# Altium PCB TRAY5.PcbDoc
Units mil, origin at the board's own origin, x right, y up, seen from the top; angles counter-clockwise.
Board outline 7360 x 1300 mil, 2 copper layers (Top Layer, Bottom Layer); 49 components, 35 nets, 178 pads, 42 vias.
Unrouted connection lines stored in the file: 64.
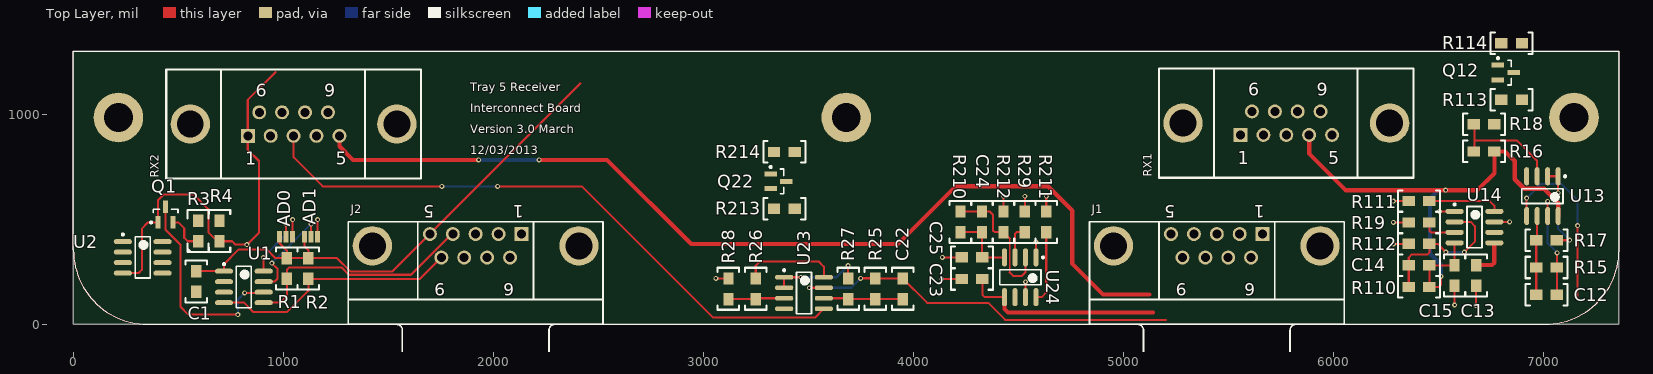
[diagram p0: Top Layer view]
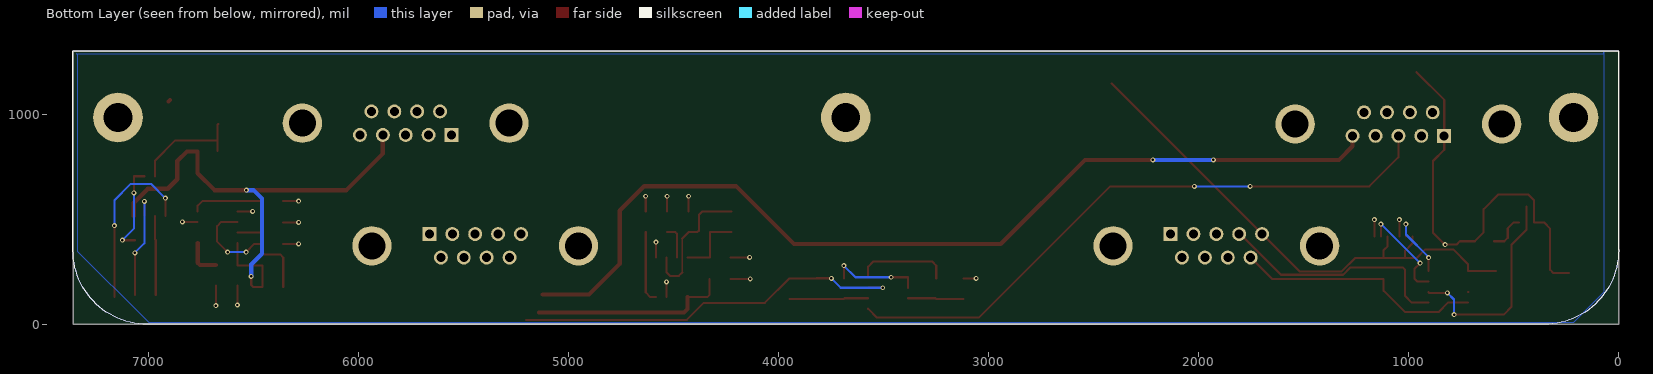
[diagram p1: Bottom Layer view, seen from below]

## Layer stack, top to bottom
Top Layer: signal copper 1.4
Dielectric: dielectric 12.6, FR-4, Dk 4.8
Bottom Layer: signal copper 1.4

## Board outline
0,0 0,1300 7360,1300 7360,0 0,0

## Design rules (kind name [scope] priority, off if disabled: settings)
Clearance [All] p1: gap=6
HoleSize [All] p1: absolutevalues=TRUE maxlimit=196.85 minlimit=11.81 maxpercent=80.000 minpercent=20.000
MinimumSolderMaskSliver [All] p1: minsoldermaskwidth=4
PolygonConnect [All] p1: connectstyle=Relief reliefconductorwidth=10 reliefentries=4 polygonreliefangle="90 Angle" airgapwidth=10
RoomDefinition SHIFTER2 [InComponentClass('SHIFTER2')] p1: confinementstyle=ConfineIn formatcopy=TRUE lockcomponents=FALSE outline 3497.87,481 3497.87,891 3037,891 3037,481
RoomDefinition LDO2 [InComponentClass('LDO2')] p2: confinementstyle=ConfineIn formatcopy=TRUE lockcomponents=FALSE outline 4050,840 4050,30 4720,30 4720,840
RoomDefinition LDO1 [InComponentClass('LDO1')] p3: confinementstyle=ConfineIn formatcopy=TRUE lockcomponents=FALSE outline 6057.51,3 6867.51,3 6867.51,673 6057.51,673
RoomDefinition AMP2 [InComponentClass('AMP2')] p4: confinementstyle=ConfineIn formatcopy=TRUE lockcomponents=FALSE outline 3040,29.21 4020,29.21 4020,479.21 3040,479.21
RoomDefinition AMP1 [InComponentClass('AMP1')] p5: confinementstyle=ConfineIn formatcopy=TRUE lockcomponents=FALSE outline 6576,1191 6576,70.51 7327,70.51 7327,1191
RoutingVias [All] p1: holewidth=15.75 width=23.62 viastyle="Through Hole" minholewidth=15.75 minwidth=23.62 maxholewidth=39.37 maxwidth=78.74
SilkscreenOverComponentPads [IsPad] p1: minsilkscreentomaskgap=10
SolderMaskExpansion [All] p1: expansion=3.94
Width [All] p1: maxlimit=50 minlimit=8 preferedwidth=20
25 further rules are at their usual default settings.

## Classes and differential pairs
channel class SHIFTER: SHIFTER1 SHIFTER2
channel class LDO: LDO1 LDO2
channel class AMP: AMP1 AMP2
component class SHIFTER2: Q22 R213 R214
component class SHIFTER1: Q12 R113 R114
component class LDO2: C23 C24 C25 R29 R210 R211 R212 U24
component class LDO1: C13 C14 C15 R19 R110 R111 R112 U14
component class AMP2: C22 R25 R26 R27 R28 U23
component class AMP1: C12 R15 R16 R17 R18 U13
component class Designator: AD0 AD1 C1 P1 Q1 R1 R2 R3 R4 U1
component class Tray5: J1 J2 RX1 RX2

## Components (designator, comment, footprint, x,y, rotation, side; value= is the part's Value field where it differs from the comment)
AD0 "Jumper Select" SOLDER_JUMPER_3_A 1020.87,410.13 r180 top
AD1 "Jumper Select" SOLDER_JUMPER_3_A 1139.87,410.13 r180 top
C1 "0805 Cap" "0805 Cap" 585,204 r270 top
C12 "0805 Cap" "0805 Cap" 7017,140.51 r180 top (schematic designator C2)
C13 "0805 Cap" "0805 Cap" 6681.51,233 r270 top (schematic designator C3)
C14 "0805 Cap" "0805 Cap" 6409.51,281 r180 top (schematic designator C4)
C15 "0805 Cap" "0805 Cap" 6578.51,233 r270 top (schematic designator C5)
C22 "0805 Cap" "0805 Cap" 3950,169.21 r270 top (schematic designator C2)
C23 "0805 Cap" "0805 Cap" 4280,216 r180 top (schematic designator C3)
C24 "0805 Cap" "0805 Cap" 4328,488 r90 top (schematic designator C4)
C25 "0805 Cap" "0805 Cap" 4280,319 r180 top (schematic designator C5)
J1 "D Connector 9" DSUB1.385-2H9 5446.06,0 r180 top
J2 "D Connector 9" DSUB1.385-2H9 1916.14,0 r180 top
P1 "Header 2" HDR1X2 6350.63,4340.39 r270 top
Q1 "DMP2004K" DMP2004KDITR-ND 439,521 r90 top
Q12 "BSS138" SOT23 6820.63,1199 r0 top (schematic designator Q2)
Q22 "BSS138" SOT23 3356.21,681 r0 top (schematic designator Q2)
R1 "0805 Resistor" "0805 Resistor" 1017,266 r270 top
R2 "0805 Resistor" "0805 Resistor" 1119,266 r270 top
R3 "PTC Fuse" "0805 Resistor" 594,445 r270 top
R4 "0603 Resistor" "0805 Resistor" 696,445 r270 top
R15 "0805 Resistor" "0805 Resistor" 7017,270.51 r180 top (schematic designator R5)
R16 "0805 Resistor" "0805 Resistor" 6719,823.51 r0 top (schematic designator R6)
R17 "0805 Resistor" "0805 Resistor" 7017,400.51 r0 top (schematic designator R7)
R18 "0805 Resistor" "0805 Resistor" 6719,953.51 r0 top (schematic designator R8)
R19 "0805 Resistor" "0805 Resistor" 6409.51,485 r0 top (schematic designator R9)
R25 "0805 Resistor" "0805 Resistor" 3820,169.21 r270 top (schematic designator R5)
R26 "0805 Resistor" "0805 Resistor" 3250,169.21 r90 top (schematic designator R6)
R27 "0805 Resistor" "0805 Resistor" 3690,169.21 r90 top (schematic designator R7)
R28 "0805 Resistor" "0805 Resistor" 3120,169.21 r90 top (schematic designator R8)
R29 "0805 Resistor" "0805 Resistor" 4532,488 r270 top (schematic designator R9)
R110 "0805 Resistor" "0805 Resistor" 6409.51,178 r180 top (schematic designator R10)
R111 "0805 Resistor" "0805 Resistor" 6409.51,587 r180 top (schematic designator R11)
R112 "0805 Resistor" "0805 Resistor" 6409.51,383 r180 top (schematic designator R12)
R113 "0805 Resistor" "0805 Resistor" 6850.63,1069 r180 top (schematic designator R13)
R114 "0805 Resistor" "0805 Resistor" 6850.63,1339 r180 top (schematic designator R14)
R210 "0805 Resistor" "0805 Resistor" 4225,488 r90 top (schematic designator R10)
R211 "0805 Resistor" "0805 Resistor" 4634,488 r90 top (schematic designator R11)
R212 "0805 Resistor" "0805 Resistor" 4430,488 r90 top (schematic designator R12)
R213 "0805 Resistor" "0805 Resistor" 3386.21,551 r180 top (schematic designator R13)
R214 "0805 Resistor" "0805 Resistor" 3386.21,821 r180 top (schematic designator R14)
RX1 "D Connector 9" "DSUB Upright" 5777,957.98 r180 top
RX2 "D Connector 9" "DSUB Upright" 1048.86,953.85 r180 top
U1 "DS24820Z+_ND" DS2482-100 812,178 r0 top
U2 "TO-92" DS18S20 330,319 r0 top
U13 "LM2904" "SOIC8 - LT1120A" 6997,610.51 r270 top (schematic designator U3)
U14 "LT1120A" "SOIC8 - LT1120A" 6673.51,463 r0 top (schematic designator U4)
U23 "LM2904" "SOIC8 - LT1120A" 3480,149.21 r0 top (schematic designator U3)
U24 "LT1120A" "SOIC8 - LT1120A" 4510,224 r270 top (schematic designator U4)

## Footprints (in the part's own frame and the unit in brackets; to place one, negate y for a bottom-side part, rotate by r counter-clockwise, add the part's x,y. Pads: shape width x height; smd on the part's side, far side on the other; paste and mask are expansions set on the pad)
"0805 Cap" [mm] "0805 Capacitor"
  rect 1.5x1.25 smd: 1(1.25,0) 2(-1.25,0)
  silkscreen extent -2.54,-1.3 2.54,1.3, body extent -1,-0.63 1.1,0.63, height 0.9
"0805 Resistor" [mm] "0805 Resistor"
  rect 1.5x1.25 smd: 1(1.25,0) 2(-1.25,0)
  silkscreen extent -2.54,-1.3 2.54,1.3, body extent -1,-0.63 1.1,0.63, height 0.6
DMP2004KDITR-ND [mm] "SOT23, 3-Leads, Body 3.0x2.5mm (max), Pitch 0.89mm, IPC Medium Density"
  rect 1.5x0.6 smd: 1(-0.9,0.89) 2(-0.9,-0.89) 3(1,0)
  silkscreen extent -1.02,-1.5 0.7,1.86, body extent -0.7,-1.5 0.7,1.5, height 1.2
DS18S20 [mm] "SOIC, 8-Leads, Body 5.0x4.0mm (max), Pitch 1.27mm, IPC Medium Density"
  oval 2.2x0.6 smd: 1(-2.4,1.905) 2(-2.4,0.635) 3(-2.4,-0.635) 4(-2.4,-1.905) 5(2.4,-1.905) 6(2.4,-0.635) 7(2.4,0.635) 8(2.4,1.905)
  silkscreen extent -2.52,-2.5 0.9,2.88, body extent -2,-2.5 2,2.5, height 1.75
DS2482-100 [mm] "SOIC, 8-Leads, Body 5.0x4.0mm (max), Pitch 1.27mm, IPC Medium Density"
  oval 2.2x0.6 smd: 1(-2.4,1.905) 2(-2.4,0.635) 3(-2.4,-0.635) 4(-2.4,-1.905) 5(2.4,-1.905) 6(2.4,-0.635) 7(2.4,0.635) 8(2.4,1.905)
  silkscreen extent -2.52,-2.5 0.9,2.88, body extent -2,-2.5 2,2.5, height 1.75
DSUB1.385-2H9 [mm] "Connector; D Subminiature; 9 Position; Right Angle; Pitch 1.385 mm"
  rect 1.69x1.69 hole 1.09: 1(-5.54,-10.92)
  round 1.69 hole 1.09: 2(-2.77,-10.92) 3(0,-10.92) 4(2.77,-10.92) 5(5.54,-10.92) 6(-4.155,-8.08) 7(-1.385,-8.08) 8(1.385,-8.08) 9(4.155,-8.08)
  round 4.76 hole 3.26: 10(-12.495,-9.5) 11(12.495,-9.5)
  silkscreen extent -15.4,-12.4 15.4,6
"DSUB Upright" [mm] "171-009-213R911"
  rect 1.69x1.69 hole 1.09: 1(5.54,1.42)
  round 1.69 hole 1.09: 2(2.77,1.42) 3(0,1.42) 4(-2.77,1.42) 5(-5.54,1.42) 6(4.153,-1.42) 7(1.384,-1.42) 8(-1.384,-1.42) 9(-4.153,-1.42)
  round 4.76 hole 3.26: 10(12.5,0) 11(-12.5,0)
  silkscreen extent -15.4,-6.6 15.4,6.6
HDR1X2 [mm] "Connector; Header; 2 Position"
  rect 1.5x1.5 hole 0.9: 1(0,0)
  round 1.5 hole 0.9: 2(2.54,0)
  silkscreen extent -1.27,-1.27 3.81,1.27
"SOIC8 - LT1120A" [mm] "SOIC, 8-Leads, Body 5.0x4.0mm (max), Pitch 1.27mm, IPC Medium Density"
  oval 2.2x0.6 smd: 1(-2.4,1.905) 2(-2.4,0.635) 3(-2.4,-0.635) 4(-2.4,-1.905) 5(2.4,-1.905) 6(2.4,-0.635) 7(2.4,0.635) 8(2.4,1.905)
  silkscreen extent -2.52,-2.5 0.9,2.88, body extent -1.99,-2.5 1.99,2.5, height 1.75
SOLDER_JUMPER_3_A [mm]
  rect 0.6x1.4 smd: 1(1,-0.2) 2(0.2,-0.2) 3(-0.6,-0.2)
SOT23 [mm] "SOT23, 3-Leads, Body 3.0x2.5mm (max), Pitch 0.89mm, IPC Medium Density"
  rect 1.5x0.6 smd: 1(-0.9,0.89) 2(-0.9,-0.89) 3(1,0)
  silkscreen extent -1.02,-1.5 0.7,1.86, body extent -0.7,-1.5 0.7,1.5, height 1.2

## Part data
AD0 AD1: library part "Header 3", "Header, 3-Pin"
C1: library part "0805 MLCC - X7R, 10%", "0805 MLCC - X7R, 10%"
C12 C13 C14 C15 C22 C23 C24 C25: library part "0805 MLCC - NP0, 5%", "0805 MLCC - NP0, 5%"
J1 J2: "Receptacle Assembly, 9 Position, Right Angle"
P1: "Header, 2-Pin"
Q1: "MOSFET P-CH 20V 600MA SOT23-3"
Q12 Q22: "N-Channel MOSFET"
R1 R2 R15 R16 R17 R18 R19 R25 R26 R27 R28 R29 R110 R111 R112 R113 R114 R210 R211 R212 R213 R214: library part "0805 Thick Film Resistor 1%", "0805 Thick Film Resistor 1%"
R3: library part "0805 PTC Fuse", "0805 PTC Fuse"
R4: library part "0603 Thick Film Resistor 1%", "0603 Thick Film Resistor 1%"
RX1 RX2: "Receptacle Assembly, 9 Position, Upright"
U1: "I2C to 1-Wire Master"
U2: library part DS18S20, "1-Wire Digital Thermometer"
U13 U23: "Dual Operational Amplifier"
U14 U24: "Low Dropout Regulator"

## Free pads (board coordinates)
  round 236.22 hole 137.8: 0(214.57,985.04) 0(3681.1,985.04) 0(7147.64,985.04)

## Via types
v1: diameter 23.62, hole 11.81, Top Layer to Bottom Layer, 42 vias

## Nets (pads, with @x,y where several pads share a name; then routed paths per layer and width w, separated by ;. In a path a pad name is that pad's centre, name@x,y a point inside that pad or via, vN(x,y) a via of type N, cw(c..) or ccw(c..) an arc to the next point about the centre after c; other vN are vias at no path point)
3V3_TELEM_RX: AD0.1 AD1.1 C1.2 J2.5 Q12.1 Q22.1 R1.2 R2.2 R3.2 R4.2 R114.1 R214.1 U1.1 | length 2535
  Top Layer w10: C1.2 717.3,253.21 U1.1 717.51,286.51 787.94,356.94 921.06,356.94 962.79,315.21 R1.2 ; AD0.1 981.5,386.5 1017,351 R1.2 ; AD1.1 1100.5,372.5 1119,354 R2.2 ; 2415.11,1147 J2.5 1520.11,252 1319,252 1255.79,315.21 R2.2 ; R1.2 R2.2
8V0_RX1: C14.2 C15.2 R16.1 R110.2 R113.2 RX1.4 U13.8 U14.4 | length 2620.1
  Top Layer w10: v1(6513,228) 6513,187 6504,178 R110.2 C14.2 6577.3,281 C15.2 6579.02,282.72 U14.4
  Top Layer w20: RX1.4 5886.06,812.94 6060,639 v1(6536,639) 6687.43,639 6768.21,719.79 R16.1 6818.69,823.51 6865,777.2 6865,691.17 6910.48,645.69 7005.31,645.69 7072,579 U13.8 ; R113.2 R113.2@6907,1061.84
  Bottom Layer w20: v1(6513,228) 6513,285 6462,336 6462,599 6502,639 v1(6536,639)
8V0_RX2: C24.2 C25.2 R26.1 R210.2 R213.2 RX2.4 U23.8 U24.4 | length 783.5
  Top Layer w10: R26.1 3250,279.21 3270,299.21 3550,299.21 3574.49,274.72 U23.8 ; R210.2 C24.2 4328,320.21 C25.2 4329.72,318.49 U24.4
9V1_RX1: C13.2 J1.2 U14.5 | length 185.7
  Top Layer w20: C13.2 6756.72,282.21 6768,293.49 U14.5
9V1_RX2: C23.2 J1.7 U24.5 | length 956.2
  Top Layer w10: C23.2 4329.21,140.79 4340.49,129.51 U24.5
  Top Layer w20: U24.5 4435,73 4452,56 5142,56
13V6_RX1: J1.1 RX1.5
13V6_RX2: J1.6 RX2.5 | length 4576.2
  Top Layer w20: RX2.5 1266.97,848.03 1332,783 v1(1930,783) ; v1(2218,783) 2542,783 2943,382 3928,382 4204,658 4641,658 4758,541 4758,288 4904,142 5124,142
  Bottom Layer w20: v1(1930,783) v1(2218,783)
AF_RX1_IN: RX1.3 U13.5 | length 847.9
  Top Layer w10: U13.5 v1(6922,601) ; 7165,131 v1(7165,470)
  Bottom Layer w10: v1(6922,601) 6990,669 7086,669 7165,590 v1(7165,470)
AF_RX1_OUT: C12.2 J1.9 R15.2 U13.7 | length 533.5
  Top Layer w10: U13.7 v1(7022,585.51) ; C12.2 R15.2 7067,271.3 v1(7067,340.51)
  Bottom Layer w10: v1(7022,585.51) 7022,385.51 v1(7067,340.51)
AF_RX2_IN: RX2.3 U23.5 | length 2962
  Top Layer w10: RX2.3 1048.86,795.14 1187,657 v1(1755,657) ; v1(2021,657) 2422,657 3047,32 3532.28,32 U23.5
  Bottom Layer w10: v1(1755,657) v1(2021,657)
AF_RX2_OUT: C22.2 J1.8 R25.2 U23.7 | length 1870.2
  Top Layer w10: v1(3505,174.21) U23.7 ; v1(3750,219.21) 3819.21,219.21 R25.2 C22.2 4066.43,102 4357,102 4438,21 5205,21
  Bottom Layer w10: v1(3505,174.21) 3705,174.21 v1(3750,219.21)
COS_RX1_IN: Q12.2 R113.1 RX1.8
COS_RX1_OUT: J1.5 Q12.3 R114.2
COS_RX2_IN: Q22.2 R213.1 RX2.8
COS_RX2_OUT: J1.4 Q22.3 R214.2
GND: AD0.3 AD1.3 C1.1 C13.1 C15.1 C23.1 C25.1 J1.3 J1.10 J1.11 J2.8 J2.10 J2.11 P1.1 R18.1 R19.2 R28.1 R29.2 R111.1 R112.1 R211.1 R212.1 RX1.9 RX1.10 RX1.11 RX2.9 RX2.10 RX2.11 U1.3 U2.3 U2.5 U13.4 U14.1 U14.7 U23.4 U24.1 U24.7 | length 1325
  Top Layer w10: U1.3@715.72,154.79 U1.3 ; AD0.3 v1(1044.5,498.75) ; AD1.3 v1(1163.5,498.75) ; v1(3060,218.43) R28.1 ; v1(4136,216) C23.1 ; v1(4139,319) C25.1 ; R212.1 v1(4430,610) ; R29.2 v1(4532,610) ; U24.7 v1(4535,202.3) ; U24.1 v1(4585,391.28) ; R211.1 v1(4634,610) ; v1(6287.51,383) R112.1 ; v1(6287.51,485) R19.2 ; v1(6287.51,587) R111.1 ; v1(6506.24,538) U14.1 ; v1(6578.51,92) C15.1 ; v1(6681.51,89) C13.1 ; U14.7 v1(6840.79,488)
NetAD0_2: AD0.2 U1.8 | length 328.4
  Top Layer w10: v1(905,318) 905,254.49 U1.8 ; AD0.2 v1(1013,477)
  Bottom Layer w10: v1(905,318) 905,320 1013,428 v1(1013,477)
NetAD1_2: AD1.2 U1.7 | length 479.5
  Top Layer w10: U1.7 958,203 972,217 972,264 v1(945,291) ; AD1.2 v1(1132,477)
  Bottom Layer w10: v1(945,291) 1131,477 v1(1132,477)
NetC12_1: C12.1 R15.1 R17.2 U13.6 | length 377.3
  Top Layer w10: C12.1 R15.1 R17.2 6972,404.72 U13.6
NetC14_1: C14.1 R110.1 R112.2 U14.2 | length 722.3
  Top Layer w10: R110.1 C14.1 6360.3,317.79 6375.51,333 6450.51,333 6458.72,341.21 R112.2 6498.3,383 v1(6537.51,343.79) ; U14.2 6655.3,488 6675.51,467.79 6675.51,393.79 v1(6625.51,343.79)
  Bottom Layer w10: v1(6537.51,343.79) v1(6625.51,343.79)
NetC22_1: C22.1 R25.1 R27.2 U23.6 | length 377.3
  Top Layer w10: U23.6 3685.79,124.21 R27.2 R25.1 C22.1
NetC24_1: C24.1 R210.1 R212.2 U24.2 | length 653.1
  Top Layer w6: 4460,247 4460,408.79
  Top Layer w10: R210.1 C24.1 4364.79,537.21 4380,522 4380,447 4388.21,438.79 R212.2 4460,408.79 ; 4460,247 4476,231 4518,231 4535,248 U24.2
NetQ1_2: Q1.2 R3.1 | length 183.5
  Top Layer w10: Q1.2 499.43,485.57 528,457 528,412 544.21,395.79 R3.1
NetQ1_3: Q1.3 U1.6 | length 1004.5
  Top Layer w10: Q1.3 439,450 510,379 510,84 548,46 v1(784,46) ; v1(816,150) 903.49,150 U1.6
  Bottom Layer w10: v1(784,46) 784,118 v1(816,150)
NetR16_2: R16.2 R18.2 U13.3 | length 540.7
  Top Layer w10: R18.2 6673,950.3 6673,876 ; R16.2@6673,826.72 6673,876 ; U13.3 6972,778 6874,876 6673,876
NetR17_1: R17.1 U13.1 U13.2 | length 438.1
  Top Layer w10: U13.2 U13.1 v1(7072,625.51) ; R17.1 v1(7127,400.51)
  Bottom Layer w10: v1(7072,625.51) 7072,455.51 v1(7127,400.51)
NetR19_1: R19.1 U14.3 | length 162.7
  Top Layer w10: R19.1 6458.72,445.79 6466.51,438 U14.3
NetR26_2: R26.2 R28.2 U23.3 | length 267.3
  Top Layer w10: R28.2 R26.2 3254.21,124.21 U23.3
NetR27_1: R27.1 U23.1 U23.2 | length 438.1
  Top Layer w10: U23.2 U23.1 v1(3465,224.21) ; R27.1 v1(3690,279.21)
  Bottom Layer w10: v1(3465,224.21) 3635,224.21 v1(3690,279.21)
NetR29_1: R29.1 U24.3 | length 162.7
  Top Layer w10: U24.3 4485,431 4492.79,438.79 R29.1
NetR111_2: R111.2 U14.8 | length 345.1
  Top Layer w10: R111.2 6745.51,587 6768,564.51 U14.8
NetR211_2: R211.2 U24.8 | length 345.1
  Top Layer w10: U24.8 4611.51,129.51 4634,152 R211.2
ONEWIRE: P1.2 Q1.1 R4.1 RX1.1 RX2.1 U1.2 U2.4 | length 2008.2
  Top Layer w10: U2.4 310,244 326,260 326,456 355.57,485.57 Q1.1 403.96,591.96 430,618 573,618 643,548 643,438 685.21,395.79 R4.1 756.21,395.79 772.25,379.75 v1(826.75,379.75) 884,437 884,778 830.75,831.25 RX2.1 830.75,1068.75 963,1201
SCL_TELEM_RX: J2.9 R2.1 U1.4 | length 1194.7
  Top Layer w10: U1.4 813,103 858,58 1017,58 1119,160 R2.1 1651.24,216.79 J2.9
SDA_TELEM_RX: J2.4 R1.1 U1.5 | length 1137.6
  Top Layer w10: U1.5 985,103 1017,135 R1.1 1017,259 1029,271 1277.37,271 1312.37,236 1607.85,236 1801.77,429.92 J2.4
pads on no net: J2.1 J2.2 J2.3 J2.6 J2.7 RX1.2 RX1.6 RX1.7 RX2.2 RX2.6 RX2.7 U2.1 U2.2 U2.6 U2.7 U2.8 U14.6 U24.6
copper on no net: | length 34040.5
  Top Layer w1: 0,354.33 ccw(c354.33,354.33) 354.33,0 7007.87,0 ccw(c7007.87,354.33) 7362.2,354.33 7362.2,1300 0,1300 0,354.33
  Bottom Layer w1: 0,354.33 ccw(c354.33,354.33) 354.33,0 7007.87,0 ccw(c7007.87,354.33) 7362.2,354.33 7362.2,1300 0,1300 0,354.33

## Polygon pours and split planes (outlines as drawn)
GND on Bottom Layer "Bottom Layer-No Net" (solid, shelved, pour order 6): 70,1295 70,153 216,7 534,7 6999,7 7013,21 7338,346 7338,360 7338,1281 7345,1288 70,1288

## Silkscreen, mask and mechanical layers (free items; w line width, h text height)
Top Overlay:
  lines w1: 0,354.33 ccw(c354.33,354.33) 354.33,0 7007.87,0 ccw(c7007.87,354.33) 7362.2,354.33 7362.2,1300 0,1300 0,354.33
  text "Tray 5 Receiver" at 1890,1110 h39.37
  text "Interconnect Board" at 1890,1010 h39.37
  text "Version 3.0 March" at 1890,910 h39.37
  text "12/03/2013" at 1890,810 h39.37
Bottom Overlay:
  lines w1: 0,354.33 ccw(c354.33,354.33) 354.33,0 7007.87,0 ccw(c7007.87,354.33) 7362.2,354.33 7362.2,1300 0,1300 0,354.33
Top Solder:
  lines w1: 0,354.33 ccw(c354.33,354.33) 354.33,0 7007.87,0 ccw(c7007.87,354.33) 7362.2,354.33 7362.2,1300 0,1300 0,354.33
Bottom Solder:
  lines w1: 0,354.33 ccw(c354.33,354.33) 354.33,0 7007.87,0 ccw(c7007.87,354.33) 7362.2,354.33 7362.2,1300 0,1300 0,354.33

## Text inside footprints (layer, text, board x,y; h text height)
J1: Top Overlay "6" at 5629.33,195.87 h59.06 r180; Top Overlay "9" at 5302.17,195.87 h59.06 r180; Top Overlay "5" at 5247.64,565.94 h59.06 r180; Top Overlay "1" at 5674.02,565.94 h59.06 r180
J2: Top Overlay "6" at 2099.41,195.87 h59.06 r180; Top Overlay "9" at 1772.24,195.87 h59.06 r180; Top Overlay "5" at 1717.72,565.94 h59.06 r180; Top Overlay "1" at 2144.09,565.94 h59.06 r180
RX1: Top Overlay "9" at 5922,1087.98 h60; Top Overlay "6" at 5597,1087.98 h60; Top Overlay "5" at 5977,762.98 h60; Top Overlay "1" at 5547,762.98 h60
RX2: Top Overlay "9" at 1193.86,1083.85 h60; Top Overlay "6" at 868.86,1083.85 h60; Top Overlay "5" at 1248.86,758.85 h60; Top Overlay "1" at 818.86,758.85 h60